# EAGLE board first_light (EAGLE 9.6.2)
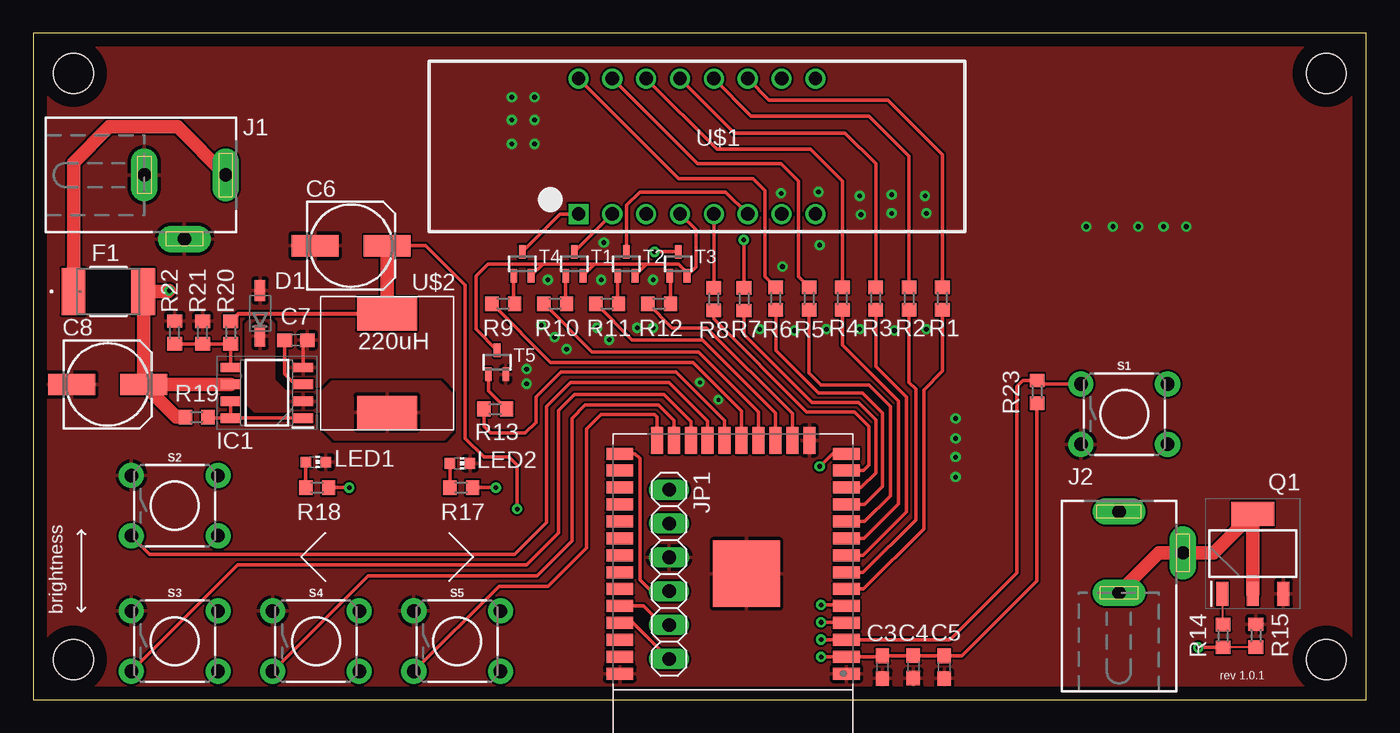
[diagram p0: board, top side]
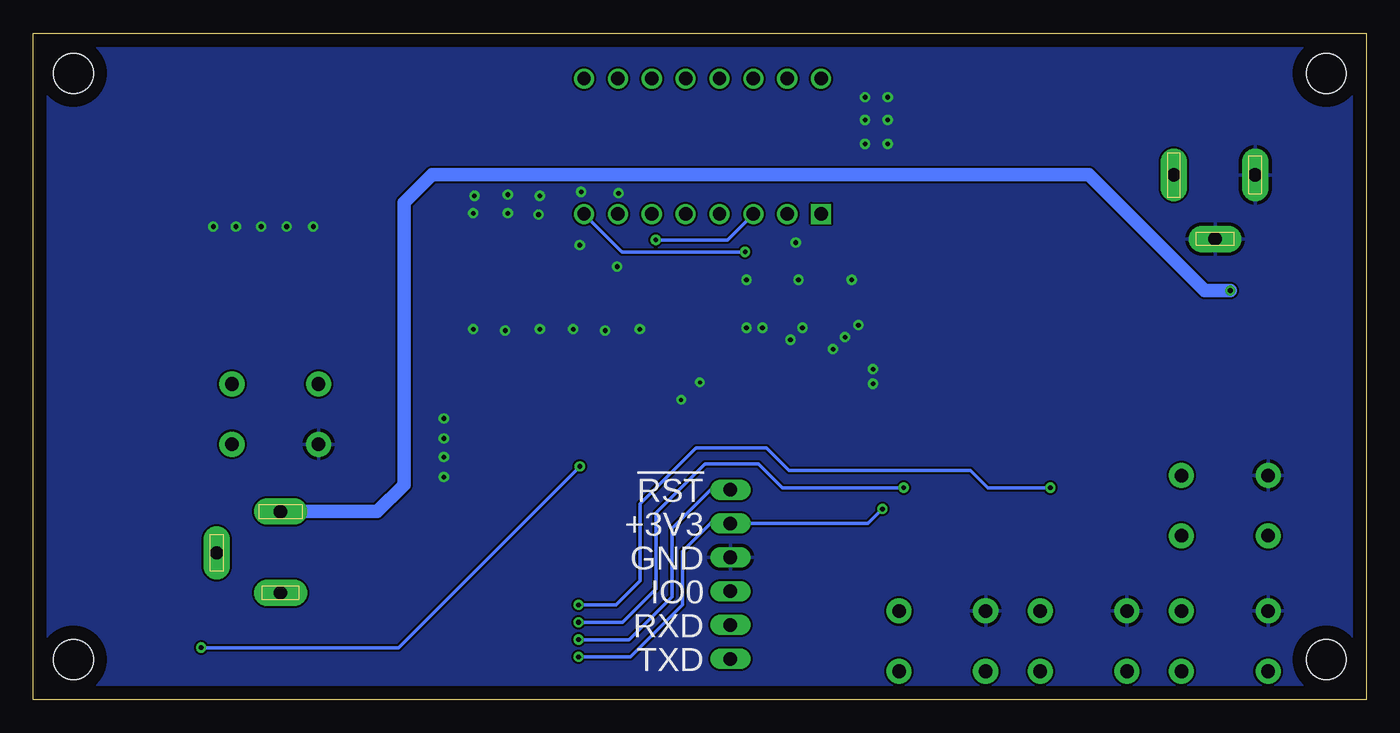
[diagram p1: board, bottom side, seen from below]

Size 100 x 50 mm. Coordinates in mm from the lower left corner, seen from the top.
Outline: 0,0 100,0 100,50 0,50 0,0
Copper layers (1*16): Top 0.035mm / dielectric 1.5mm / Bottom 0.035mm
Design rules "default *": minimum track width 6mil, minimum drill 0.3mm, track to track 6mil, track to pad 6mil, pad to pad 6mil, via to via 6mil, smd to smd 6mil, copper to edge 40mil, drill to drill 6mil, minimum pad ring 10mil, minimum via ring 8mil, stop-mask expansion 4mil, vias tented up to drill 25mil, thermal gap 10mil
Holes 3 mm at 97,47 97,3 3,47 3,3

## Footprints (pad centres in the part's own frame; a part is rotated, then mirrored left to right if it is on the bottom)
C0603 = smd 1.1 x 1: 1 -0.85,0; 2 0.85,0
153CLV-0605 = smd 3.5 x 1.6: + 2.7,0; - -2.7,0
SOD123 = smd 1.6 x 0.8: 1 -1.7,0; 2 1.7,0
0ZCG_BEL = smd 1.778 x 3.505: 1 -2.616,0; 2 2.616,0
SOIC127P600X175-8N = smd 1.525 x 0.7: 1 -2.712,1.905; 2 -2.712,0.635; 3 -2.712,-0.635; 4 -2.712,-1.905; 5 2.712,-1.905; 6 2.712,-0.635; 7 2.712,0.635; 8 2.712,1.905
DCJ0202 = drill 1 pad 2 long: 1 0,3.1; 2 4.8,0; 3 0,-3
1X06 = drill 1.016 long: 1 -6.35,0; 2 -3.81,0; 3 -1.27,0; 4 1.27,0; 5 3.81,0; 6 6.35,0
CHIP-LED0603 = smd 0.8 x 0.8: A 0,-0.75; C 0,0.75
SOT230P700X180-4N = smd 1.8 x 0.9: 1 -3,2.3; 2 -3,0; 3 -3,-2.3 | smd 1.8 x 3.2: 4 3,0
R0603 = smd 1 x 1.1: 1 -0.85,0; 2 0.85,0
TACTILE_SWITCH_PTH_6.0MM = drill 1.016 pad 1.88: 1 -3.251,2.261; 2 3.251,2.261; 3 -3.251,-2.261; 4 3.251,-2.261
SOT323 = smd 0.5 x 1: 1 0,0.9; 2 -0.65,-0.9; 3 0.65,-0.9
MODULE_ESP32-WROOM-32D = smd 2 x 0.9: 1 -8.5,5.26; 2 -8.5,3.99; 3 -8.5,2.72; 4 -8.5,1.45; 5 -8.5,0.18; 6 -8.5,-1.09; 7 -8.5,-2.36; 8 -8.5,-3.63; 9 -8.5,-4.9; 10 -8.5,-6.17; 11 -8.5,-7.44; 12 -8.5,-8.71; 13 -8.5,-9.98; 14 -8.5,-11.25; 25 8.5,-11.25; 26 8.5,-9.98; 27 8.5,-8.71; 28 8.5,-7.44; 29 8.5,-6.17; 30 8.5,-4.9; 31 8.5,-3.63; 32 8.5,-2.36; 33 8.5,-1.09; 34 8.5,0.18; 35 8.5,1.45; 36 8.5,2.72; 37 8.5,3.99; 38 8.5,5.26 | smd 0.9 x 2: 15 -5.715,-12.25; 16 -4.445,-12.25; 17 -3.175,-12.25; 18 -1.905,-12.25; 19 -0.635,-12.25; 20 0.635,-12.25; 21 1.905,-12.25; 22 3.175,-12.25; 23 4.445,-12.25; 24 5.715,-12.25 | smd 5 x 5: 39 -1,-2.24
TDCG1060M = drill 1 square: P$1 -8.89,-5.08 | drill 1: P$2 -6.35,-5.08; P$3 -3.81,-5.08; P$4 -1.27,-5.08; P$5 1.27,-5.08; P$6 3.81,-5.08; P$7 6.35,-5.08; P$8 8.89,-5.08; P$9 8.89,5.08; P$10 6.35,5.08; P$11 3.81,5.08; P$12 1.27,5.08; P$13 -1.27,5.08; P$14 -3.81,5.08; P$15 -6.35,5.08; P$16 -8.89,5.08
1010_INDUCTOR = smd 2.5 x 4.5: 1 -3.7,0; 2 3.7,0

## Placement (x,y rotation side)
C3  100nF  [C0603]  63.7,2.43 270 top
C4  100nF  [C0603]  66.02,2.46 270 top
C5  100nF  [C0603]  68.34,2.43 270 top
C6  470uF  [153CLV-0605]  23.84,34.06 0 top
C7  470pF  [C0603]  19.7,26.97 0 top
C8  100uF  [153CLV-0605]  5.58,23.65 0 top
D1  SCHOTTKY-1N5819HW-7-F  [SOD123]  17.01,28.99 90 top
F1  0ZCG0160BF2C  [0ZCG_BEL]  5.63,30.62 0 top
IC1  MC34063AD  [SOIC127P600X175-8N]  17.52,23.02 180 top
J1  DCJ0202  [DCJ0202]  11.33,39.37 270 top
J2  DCJ0202  [DCJ0202]  81.45,11.01 0 top
JP1  PROG  [1X06]  47.7,9.4 270 top
LED1  ALM  [CHIP-LED0603]  21.2,17.82 270 top
LED2  SET  [CHIP-LED0603]  32,17.71 270 top
Q1  ZXMN4A06GTA  [SOT230P700X180-4N]  91.49,10.95 90 top
R1  330  [R0603]  68.2,30.1 90 top
R2  330  [R0603]  65.7,30.1 90 top
R3  330  [R0603]  63.2,30.1 90 top
R4  330  [R0603]  60.7,30.1 90 top
R5  330  [R0603]  58.2,30.1 90 top
R6  330  [R0603]  55.7,30.1 90 top
R7  330  [R0603]  53.32,30.04 270 top
R8  330  [R0603]  51.06,30.06 270 top
R9  330  [R0603]  35.25,29.7 0 top
R10  330  [R0603]  39.15,29.7 0 top
R11  330  [R0603]  43.05,29.7 0 top
R12  330  [R0603]  46.95,29.7 0 top
R13  330  [R0603]  34.65,21.8 0 top
R14  100R  [R0603]  89.26,4.77 90 top
R15  10k  [R0603]  91.72,4.8 90 top
R17  330  [R0603]  32.1,15.9 0 top
R18  330  [R0603]  21.3,15.9 0 top
R19  0.33R  [R0603]  12.25,21.2 0 top
R20  8k2  [R0603]  14.81,27.54 90 top
R21  10k  [R0603]  12.7,27.54 90 top
R22  10k  [R0603]  10.6,27.56 90 top
R23  10k  [R0603]  75.3,23.1 270 top
S1  tact  [TACTILE_SWITCH_PTH_6.0MM]  81.85,21.42 0 top
S2  UP  [TACTILE_SWITCH_PTH_6.0MM]  10.61,14.55 0 top
S3  DOWN  [TACTILE_SWITCH_PTH_6.0MM]  10.61,4.38 0 top
S4  LEFT  [TACTILE_SWITCH_PTH_6.0MM]  21.2,4.38 0 top
S5  RIGHT  [TACTILE_SWITCH_PTH_6.0MM]  31.8,4.38 0 top
T1  UM2222AU3T106  [SOT323]  40.59,32.71 0 top
T2  UM2222AU3T106  [SOT323]  44.49,32.71 0 top
T3  UM2222AU3T106  [SOT323]  48.39,32.71 0 top
T4  UM2222AU3T106  [SOT323]  36.69,32.71 0 top
T5  UM2222AU3T106  [SOT323]  34.79,25.31 0 top
U1  ESP32-WROOM-32D  [MODULE_ESP32-WROOM-32D]  52.5,7.2 180 top
U$1  TDCG1060M  [TDCG1060M]  49.79,41.52 0 top
U$2  220uH  [1010_INDUCTOR]  26.54,25.25 270 top

## Library data of the parts
C3-C8 = rcl; SPICEPREFIX: C
D1 = Schottky-1N5819HW-7-F
F1 = 0ZCG0160BF2C; COPYRIGHT: Copyright (C) 2021 Ultra Librarian. All rights reserved.; MANUFACTURER_PART_NUMBER: 0ZCG0160BF2C; MFR_NAME: Belfuse
IC1 = MC34063AD; ARROW_PART_NUMBER: MC34063AD; ARROW_PRICE-STOCK: https://www.arrow.com/en/products/mc34063ad/on-semiconductor; DESCRIPTION: Step up/down converter,MC34063AD 98pcs; HEIGHT: 1.75mm; MANUFACTURER_NAME: ON Semiconductor; MANUFACTURER_PART_NUMBER: MC34063AD; MOUSER_PART_NUMBER: 512-MC34063AD; MOUSER_PRICE-STOCK: http://www.mouser.com/Search/ProductDetail.aspx?qs=qJQOsIEC8WHIuBHtgH5ZSQ%3d%3d
J1 J2 = con-jack; OC_FARNELL: unknown; OC_NEWARK: unknown
JP1 = pinhead
LED1 LED2 = led
Q1 = ZXMN4A06GTA; ARROW_PART_NUMBER: ZXMN4A06GTA; ARROW_PRICE-STOCK: https://www.arrow.com/en/products/zxmn4a06gta/diodes-incorporated?region=nac; DESCRIPTION: MOSFET 40V N-Chnl UMOS; HEIGHT: 1.8mm; MANUFACTURER_NAME: Diodes Inc.; MANUFACTURER_PART_NUMBER: ZXMN4A06GTA; MOUSER_PART_NUMBER: 522-ZXMN4A06GTA; MOUSER_PRICE-STOCK: https://www.mouser.co.uk/ProductDetail/Diodes-Incorporated/ZXMN4A06GTA?qs=rI7uf1IzohTuiF7NiXeyvA%3D%3D
R1-R15 R17-R23 = rcl; SPICEPREFIX: R
S1-S5 = SparkFun-Switches; PROD_ID: SWCH-08441; SF_SKU: COM-00097
T1-T5 = zetex; MPN: DSS4160U-7; OC_FARNELL: 1710696; OC_NEWARK: 25R4558
U1 = ESP32-WROOM-32D; AVAILABILITY: Unavailable; DESCRIPTION: IC: SoC; GPIO, I2C, I2S, IR, SD, SDIO, SPI, UART; 2.7÷3.6VDC; 20dBm; MF: Espressif Systems; MP: ESP32-WROOM-32D; PACKAGE: Module Espressif Systems; PRICE: None
U$1 = TDCG1060M
U$2 = 1010_INDUCTOR

## Nets
!RST: JP1.1 R23.1 S1.1 U1.3
+3V3: C3.1 C4.1 C5.1 C6.+ JP1.2 R20.2 R23.2 U1.2 U$2.1
+12V: C8.+ F1.2 IC1.6 J2.1 R19.1
BTN_DN: S3.3 U1.22
BTN_L: S4.3 U1.23
BTN_R: S5.3 U1.24
BTN_UP: S2.3 U1.21
GND: C3.2 C4.2 C5.2 C6.- C7.2 C8.- D1.2 IC1.4 J1.2 J1.3 JP1.3 LED1.C LED2.C Q1.3 R15.2 R21.2 R22.2 S1.3 S2.1 S3.1 S4.1 S5.1 T5.3 U1.1 U1.15 U1.38 U1.39
IO0: JP1.4 U1.25
LED_ALM: R18.2 U1.5
LED_PWM: R14.1 R15.1 U1.14
LED_SET: R17.2 U1.4
N$1: R1.2 U$1.P$11
N$2: R2.2 U$1.P$12
N$3: R3.2 U$1.P$13
N$4: R4.2 U$1.P$14
N$5: R5.2 U$1.P$15
N$6: R6.2 U$1.P$16
N$7: R7.1 U$1.P$3
N$8: R8.1 U$1.P$5
N$9: T4.1 U$1.P$1
N$10: T1.1 U$1.P$2
N$11: T2.1 U$1.P$6
N$12: T3.1 U$1.P$8
N$13: T1.3 T2.3 T3.3 T4.3 T5.1 U$1.P$4
N$15: R13.2 T5.2
N$16: R12.2 T3.2
N$17: R11.2 T2.2
N$18: R10.2 T1.2
N$19: R9.2 T4.2
N$21: J2.2 J2.3 Q1.2 Q1.4
N$23: Q1.1 R14.2
N$24: LED2.A R17.1
N$26: LED1.A R18.1
N$28: IC1.1 IC1.7 IC1.8 R19.2
N$29: IC1.5 R20.1 R21.1 R22.1
N$32: F1.1 J1.1
RXD0: JP1.5 U1.34
SSD_A: R4.1 U1.9
SSD_B: R6.1 U1.11
SSD_BLANK: R13.1 U1.20
SSD_C: R3.1 U1.8
SSD_D: R7.2 U1.12
SSD_D1: R9.1 U1.19
SSD_D2: R10.1 U1.18
SSD_D3: R11.1 U1.17
SSD_D4: R12.1 U1.16
SSD_E: R8.2 U1.13
SSD_F: R1.1 U1.6
SSD_G: R5.1 U1.10
SSD_L1L2: R2.1 U1.7
SWITCH: D1.1 IC1.2 U$2.2
TIMING_CAP: C7.1 IC1.3
TXD0: JP1.6 U1.35

## Tracks (layer width: path | path; a pad name or v marks a point on that pad's centre or on a via)
!RST  (via drill 0.35)
  Top 0.254: v59.1,4.5 60.98,4.5 U1.3 68.78,4.48 73.8,9.5 73.8,23.5 74.25,23.95 R23.1 75.57,23.68 S1.1
  Bottom 0.254: JP1.1 49.2,15.75 52.1,12.85 52.1,7.7 55.3,4.5 v59.1,4.5
+3V3  (via drill 0.35)
  Top 0.254: R23.2 75.3,8.9 69.68,3.28 C5.1 66.05,3.28 C4.1 65.99,3.28 C3.1 63.63,3.21 U1.2 v59.1,3.2 | C6.+ 29.44,34.06 32.4,31.1 32.4,19.6 33.8,18.2 35.7,18.2 36.3,17.6 v36.3,14.3
  Top 0.305: U$2.1 15.37,28.95 R20.2
  Top 1.016: U$2.1 C6.+
  Bottom 0.254: v59.1,3.2 55.2,3.2 51.3,7.1 51.3,11.11 49.2,13.21 JP1.2 37.39,13.21 v36.3,14.3
+12V  (via drill 0.35)
  Top 1.016: C8.+ 8.28,30.59 F1.2 10.12,30.62 v10.2,30.7 | C8.+ 10.73,21.2 R19.1 | C8.+ IC1.6
  Bottom 1.016: v10.2,30.7 12.1,30.7 20.8,39.4 70.1,39.4 72.2,37.3 72.2,16.1 74.19,14.11 J2.1
BTN_DN
  Top 0.254: S3.3 15.34,10.1 37,10.1 39.4,12.5 39.4,21.7 40.6,22.9 47.3,22.9 49.33,20.88 U1.22
BTN_L
  Top 0.254: S4.3 25.13,9.3 37.8,9.3 40.4,11.9 40.4,21.1 41.4,22.1 46.9,22.1 48.05,20.95 U1.23
BTN_R
  Top 0.254: U1.24 46.78,21.21 46.6,21.4 42.6,21.4 41.5,20.3 41.5,11.4 38.6,8.5 34.93,8.5 S5.3
BTN_UP
  Top 0.254: S2.3 8.75,10.9 36.1,10.9 38.5,13.3 38.5,22 40.3,23.8 47.7,23.8 50.59,20.91 U1.21
GND  (via drill 0.3, 0.35)
  Top 0.254: C7.2 20.23,26.65 IC1.4
  other vias: 38.1,28.1 39.1,27.2 40,26.3 43.2,27 42.3,27.9 46.5,27.9 45.3,27.9 42.8,34.3 42.6,31.5 46.5,31.5 38.6,31.5 54.5,27.8 57.1,27.7 59.5,27.8 62,27.8 64.6,27.7 67,27.8 66.9,37.8 67,36.5 64.4,37.9 64.4,36.5 62,37.8 62.1,36.4 58.9,38.1 59,34.1 56.2,32.5 56.1,38 37.6,45.2 35.9,45.2 35.9,43.5 37.6,43.5 37.6,41.7 35.9,41.7 51.4,22.5 50,23.8 37,24.8 37,23.7 69.2,21.1 69.2,19.6 69.2,18.2 69.2,16.7 86.5,35.5 84.8,35.5 82.9,35.5 81,35.5 79,35.5
  pour Top (rank 2): -0.2,50.5 100.3,50.5 100.9,49.9 100.9,-0.2 98.7,-2.4 -0.8,-2.4 -0.8,49.9
  pour Bottom: -4.1,50.6 -2.2,52.5 101.3,52.5 102.8,51 102.8,-3.6 -2.5,-3.6 -4.1,-2
IO0
  Top 0.254: U1.25 45.15,18.45 45.5,18.1 45.5,9 46.37,8.13 JP1.4
LED_ALM  (via drill 0.35)
  Top 0.254: R18.2 v23.7,15.9 | v59.1,7.1 60.92,7.1 U1.5
  Bottom 0.254: v23.7,15.9 28.4,15.9 29.7,17.2 43.3,17.2 45,18.9 50.3,18.9 54.5,14.7 54.5,8.9 56.3,7.1 v59.1,7.1
LED_PWM  (via drill 0.35)
  Top 0.152: R14.1 89.29,3.95 R15.1
  Top 0.254: R14.1 87.42,3.92 v87.4,3.9 | v59,17.5 59.95,18.45 U1.14
  Bottom 0.254: v87.4,3.9 72.6,3.9 v59,17.5
LED_SET  (via drill 0.35)
  Top 0.254: R17.2 v34.7,15.9 | v59.1,5.8 60.95,5.8 U1.4
  Bottom 0.254: v34.7,15.9 43.8,15.9 45.6,17.7 49.6,17.7 53.3,14 53.3,8.3 55.8,5.8 v59.1,5.8
N$1
  Top 0.254: R1.2 68.2,40.9 64.1,45 55.2,45 U$1.P$11
N$2
  Top 0.254: R2.2 65.7,40.8 62.7,43.8 53.86,43.8 U$1.P$12
N$3
  Top 0.254: R3.2 63.2,40.2 60.9,42.5 52.62,42.5 U$1.P$13
N$4
  Top 0.254: R4.2 60.7,38.9 58.3,41.3 51.28,41.3 U$1.P$14
N$5
  Top 0.254: U$1.P$15 49.84,40.2 56.1,40.2 57.4,38.9 57.4,31.75 R5.2
N$6
  Top 0.254: U$1.P$16 48.4,39.1 54,39.1 54.9,38.2 54.9,31.75 R6.2
N$7  (via drill 0.35)
  Top 0.254: R7.1 53.32,34.48 v53.3,34.5
  Bottom 0.254: v53.3,34.5 47.92,34.5 U$1.P$3
N$8
  Top 0.254: R8.1 U$1.P$5
N$9
  Top 0.254: T4.1 39.52,36.44 U$1.P$1
N$10
  Top 0.254: T1.1 43.42,36.44 U$1.P$2
N$11
  Top 0.254: T2.1 44.49,37.09 45.5,38.1 51.94,38.1 U$1.P$6
N$12  (via drill 0.35)
  Top 0.254: T3.1 v46.61,33.61 v46.6,33.6
  Bottom 0.254: v46.6,33.6 55.84,33.6 U$1.P$8
N$13
  Top 0.254: T4.3 38.23,32.7 | 38.23,32.7 42.1,32.7 | 42.1,32.7 46,32.7 | 46,32.7 48.4,32.7 49.04,32.06 T3.3 49.7,32.47 49.7,35.26 U$1.P$4 | T2.3 46,32.67 46,32.7 | T1.3 42.1,32.67 42.1,32.7 | T5.1 33.2,27.8 33.2,31.8 34.1,32.7 38.23,32.7
N$15
  Top 0.254: T5.2 34.14,23.16 R13.2
N$16
  Top 0.254: T3.2 47.8,31.75 R12.2
N$17
  Top 0.254: T2.2 43.84,29.77 R11.2
N$18
  Top 0.254: T1.2 39.94,29.77 R10.2
N$19
  Top 0.254: T4.2 36.04,29.77 R9.2
N$21
  Top 1.016: Q1.2 Q1.4 88.55,11.01 J2.2 84.45,11.01 J2.3
N$23
  Top 0.152: Q1.1 89.19,5.69 R14.2
N$24
  Top 0.254: LED2.A R17.1
N$26
  Top 0.254: LED1.A 20.45,15.91 R18.1
N$28
  Top 0.254: IC1.1 IC1.8 | IC1.8 IC1.7 | IC1.8 13.19,21.11 R19.2
N$29
  Top 0.254: IC1.5 R20.1 R21.1 10.62,26.69 R22.1
N$32
  Top 1.016: J1.1 10.82,42.98 5.7,42.98 3.01,40.29 F1.1
RXD0
  Top 0.254: JP1.5 47.21,5.59 45.78,7.02 U1.34
SSD_A
  Top 0.254: R4.1 60.7,26.6 64.9,22.4 64.9,14.7 62.3,12.1 U1.9
SSD_B
  Top 0.254: R6.1 55.7,26.2 58.9,23 62.2,23 63.7,21.5 63.7,16 62.34,14.64 U1.11
SSD_BLANK
  Top 0.254: R13.1 33.8,20.5 34.3,20 36.9,20 37.7,20.8 37.7,22.7 39.6,24.6 48.2,24.6 51.87,20.93 U1.20
SSD_C
  Top 0.254: R3.1 63.2,25 65.5,22.7 65.5,14.1 62.23,10.83 U1.8
SSD_D
  Top 0.254: R7.2 53.32,27.38 58.4,22.3 61.9,22.3 63.2,21 63.2,17 62.11,15.91 U1.12
SSD_D1
  Top 0.254: R9.1 38.8,25.3 49.5,25.3 53.13,21.66 U1.19
SSD_D2
  Top 0.254: R10.1 41.91,26.1 49.9,26.1 54.41,21.59 U1.18
SSD_D3
  Top 0.254: R11.1 44.91,27 50.2,27 55.67,21.52 U1.17
SSD_D4
  Top 0.254: R12.1 47.91,27.9 50.5,27.9 56.95,21.45 U1.16
SSD_E
  Top 0.254: U1.13 62.28,17.18 62.7,17.6 62.7,20.5 61.6,21.6 58,21.6 51.06,28.54 R8.2
SSD_F
  Top 0.254: R1.1 68.2,24.65 66.8,23.25 66.8,12.8 62.29,8.29 U1.6
SSD_G
  Top 0.254: R5.1 58.2,24.5 59.1,23.6 62.7,23.6 64.3,22 64.3,15.3 62.37,13.37 U1.10
SSD_L1L2
  Top 0.254: R2.1 65.7,23.8 66.2,23.3 66.2,13.5 62.26,9.56 U1.7
SWITCH
  pour Top: 17.8,28.5 16.2,28.5 15.9,28.2 15.9,22.3 16.6,21.6 21.6,21.6 21.6,20.5 22.6,19.5 30.8,19.5 31.5,20.2 31.5,22.9 30.5,23.9 22.4,23.9 21.7,23.2 18.9,23.2 18.1,24 18.1,28.2
TIMING_CAP
  Top 0.254: C7.1 18.85,24.45 19.64,23.66 IC1.3
TXD0
  Top 0.254: JP1.6 45,5.75 U1.35

## Text on the board
tNames: brightness | rev 1.0.1
bNames: !RST | +3V3 | GND | IO0 | RXD | TXD
tStop: j. wylie | 16 / 05 / 2022 | first light